# EAGLE board MonitorBoard (EAGLE 7.7.0)
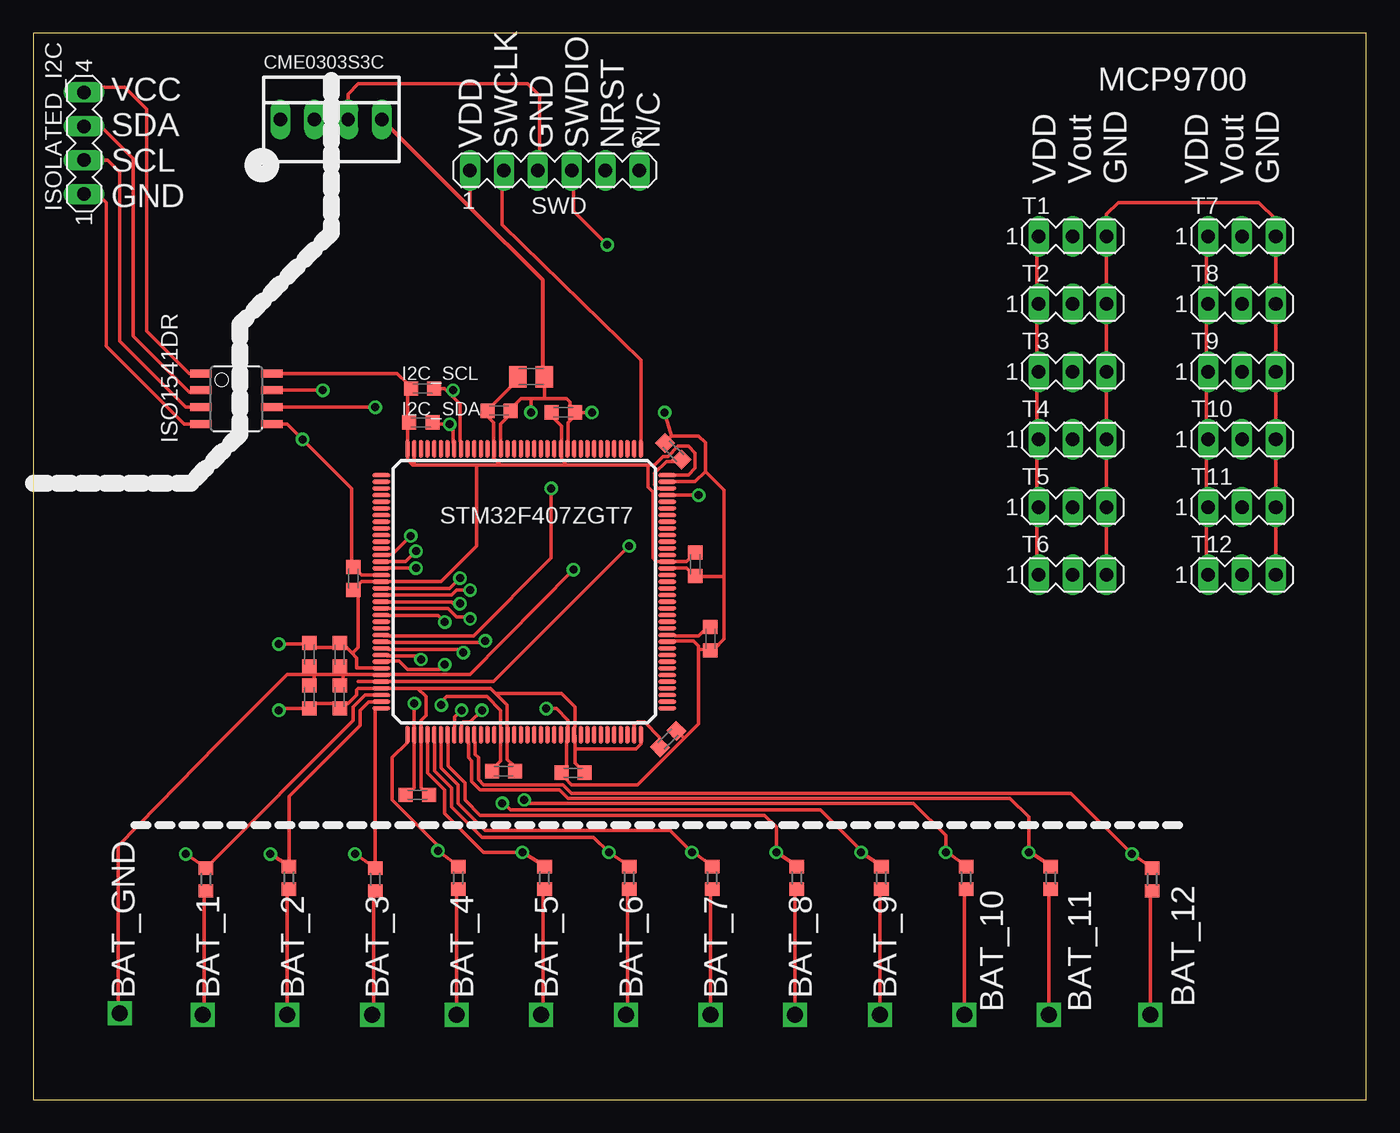
[diagram p0: board, top side]
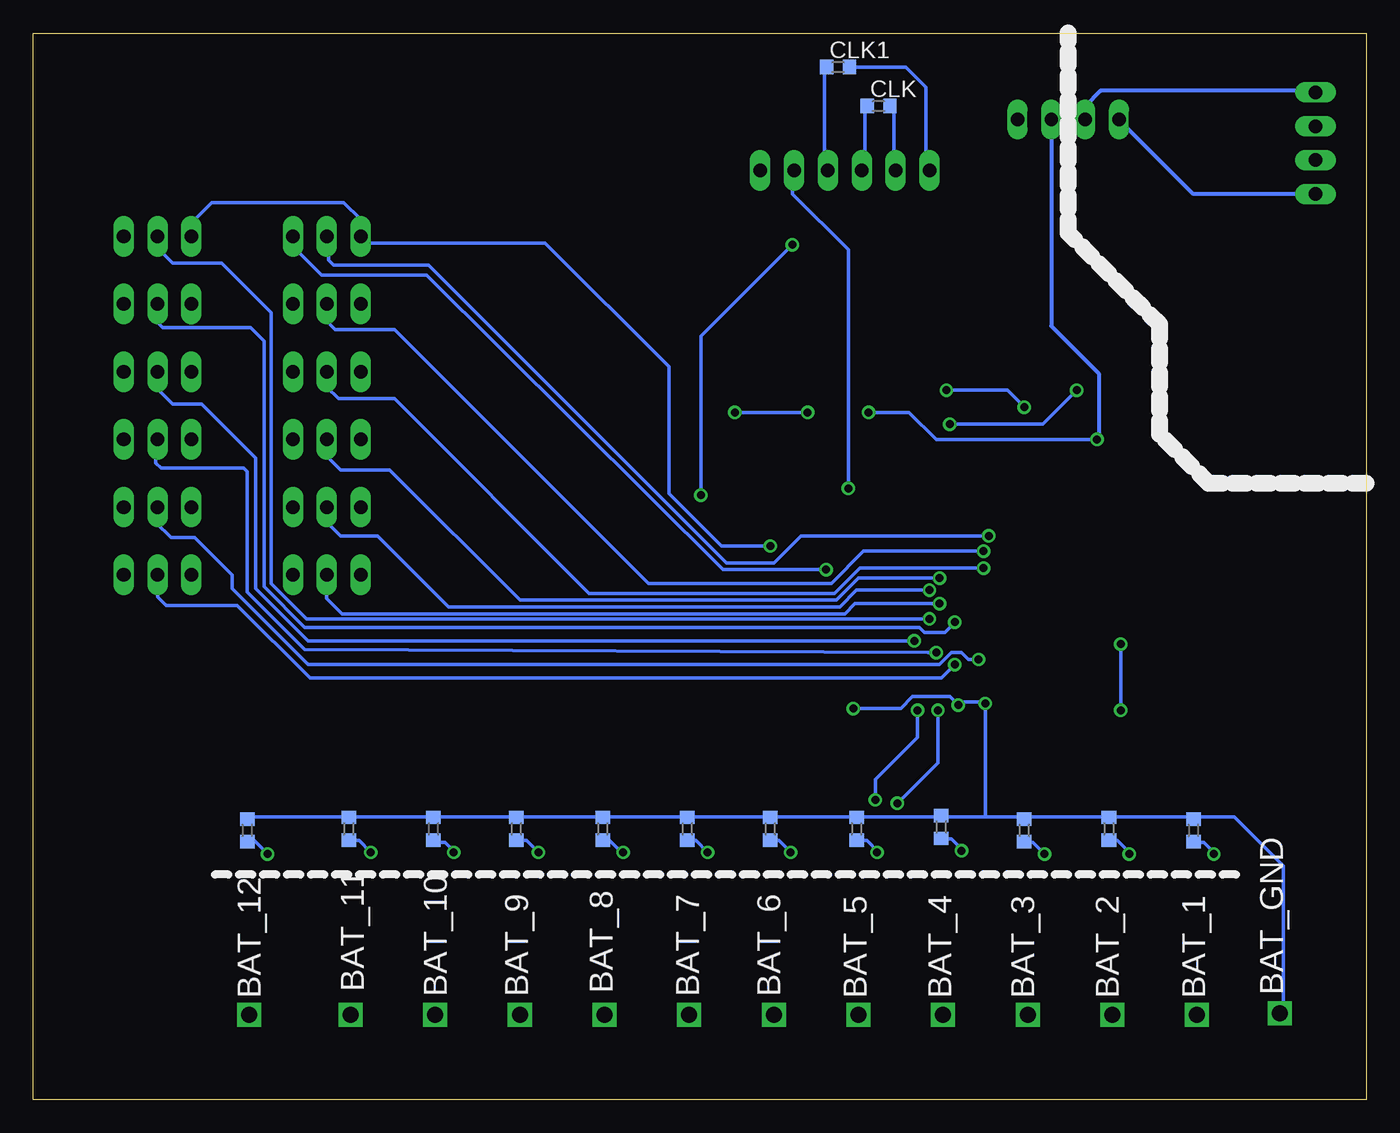
[diagram p1: board, bottom side, seen from below]

Size 100 x 80 mm. Coordinates in mm from the lower left corner, seen from the top.
Outline: 0,0 100,0 100,80 0,80 0,0
Copper layers (1*16): Top 0.035mm / dielectric 1.5mm / Bottom 0.035mm
Design rules "default": minimum track width 10mil, minimum drill 24mil, track to track 8mil, track to pad 8mil, pad to pad 8mil, via to via 8mil, smd to smd 8mil, copper to edge 40mil, drill to drill 8mil, minimum pad ring 10mil, minimum via ring 8mil, stop-mask expansion 4mil, vias tented up to drill 0mil, thermal gap 10mil

## Footprints (pad centres in the part's own frame; a part is rotated, then mirrored left to right if it is on the bottom)
C0805K = smd 1.3 x 1.6: 1 -1,0; 2 1,0
R0603 = smd 1 x 1.1: 1 -0.85,0; 2 0.85,0
22-23-2041 = drill 1 long: 1 -3.81,0; 2 -1.27,0; 3 1.27,0; 4 3.81,0
C0603K = smd 1.05 x 1.08: 1 -0.875,0; 2 0.875,0
8S1 = smd 0.6 x 1.6: 1 -1.905,-2.654; 2 -0.645,-2.654; 3 0.625,-2.654; 4 1.895,-2.654; 5 1.905,2.654; 6 0.635,2.654; 7 -0.635,2.654; 8 -1.905,2.654
MA04-1 = drill 1.016 long: 1 -3.81,0; 2 -1.27,0; 3 1.27,0; 4 3.81,0
P-TQFP-144-19 = smd 1.35 x 0.29: 1 -10.725,8.75; 2 -10.725,8.25; 3 -10.725,7.75; 4 -10.725,7.25; 5 -10.725,6.75; 6 -10.725,6.25; 7 -10.725,5.75; 8 -10.725,5.25; 9 -10.725,4.75; 10 -10.725,4.25; 11 -10.725,3.75; 12 -10.725,3.25; 13 -10.725,2.75; 14 -10.725,2.25; 15 -10.725,1.75; 16 -10.725,1.25; 17 -10.725,0.75; 18 -10.725,0.25; 19 -10.725,-0.25; 20 -10.725,-0.75; 21 -10.725,-1.25; 22 -10.725,-1.75; 23 -10.725,-2.25; 24 -10.725,-2.75; 25 -10.725,-3.25; 26 -10.725,-3.75; 27 -10.725,-4.25; 28 -10.725,-4.75; 29 -10.725,-5.25; 30 -10.725,-5.75; 31 -10.725,-6.25; 32 -10.725,-6.75; 33 -10.725,-7.25; 34 -10.725,-7.75; 35 -10.725,-8.25; 36 -10.725,-8.75; 73 10.725,-8.75; 74 10.725,-8.25; 75 10.725,-7.75; 76 10.725,-7.25; 77 10.725,-6.75; 78 10.725,-6.25; 79 10.725,-5.75; 80 10.725,-5.25; 81 10.725,-4.75; 82 10.725,-4.25; 83 10.725,-3.75; 84 10.725,-3.25; 85 10.725,-2.75; 86 10.725,-2.25; 87 10.725,-1.75; 88 10.725,-1.25; 89 10.725,-0.75; 90 10.725,-0.25; 91 10.725,0.25; 92 10.725,0.75; 93 10.725,1.25; 94 10.725,1.75; 95 10.725,2.25; 96 10.725,2.75; 97 10.725,3.25; 98 10.725,3.75; 99 10.725,4.25; 100 10.725,4.75; 101 10.725,5.25; 102 10.725,5.75; 103 10.725,6.25; 104 10.725,6.75; 105 10.725,7.25; 106 10.725,7.75; 107 10.725,8.25; 108 10.725,8.75 | smd 0.29 x 1.35: 37 -8.75,-10.725; 38 -8.25,-10.725; 39 -7.75,-10.725; 40 -7.25,-10.725; 41 -6.75,-10.725; 42 -6.25,-10.725; 43 -5.75,-10.725; 44 -5.25,-10.725; 45 -4.75,-10.725; 46 -4.25,-10.725; 47 -3.75,-10.725; 48 -3.25,-10.725; 49 -2.75,-10.725; 50 -2.25,-10.725; 51 -1.75,-10.725; 52 -1.25,-10.725; 53 -0.75,-10.725; 54 -0.25,-10.725; 55 0.25,-10.725; 56 0.75,-10.725; 57 1.25,-10.725; 58 1.75,-10.725; 59 2.25,-10.725; 60 2.75,-10.725; 61 3.25,-10.725; 62 3.75,-10.725; 63 4.25,-10.725; 64 4.75,-10.725; 65 5.25,-10.725; 66 5.75,-10.725; 67 6.25,-10.725; 68 6.75,-10.725; 69 7.25,-10.725; 70 7.75,-10.725; 71 8.25,-10.725; 72 8.75,-10.725; 109 8.75,10.725; 110 8.25,10.725; 111 7.75,10.725; 112 7.25,10.725; 113 6.75,10.725; 114 6.25,10.725; 115 5.75,10.725; 116 5.25,10.725; 117 4.75,10.725; 118 4.25,10.725; 119 3.75,10.725; 120 3.25,10.725; 121 2.75,10.725; 122 2.25,10.725; 123 1.75,10.725; 124 1.25,10.725; 125 0.75,10.725; 126 0.25,10.725; 127 -0.25,10.725; 128 -0.75,10.725; 129 -1.25,10.725; 130 -1.75,10.725; 131 -2.25,10.725; 132 -2.75,10.725; 133 -3.25,10.725; 134 -3.75,10.725; 135 -4.25,10.725; 136 -4.75,10.725; 137 -5.25,10.725; 138 -5.75,10.725; 139 -6.25,10.725; 140 -6.75,10.725; 141 -7.25,10.725; 142 -7.75,10.725; 143 -8.25,10.725; 144 -8.75,10.725
MA06-1 = drill 1.016 long: 1 -6.35,0; 2 -3.81,0; 3 -1.27,0; 4 1.27,0; 5 3.81,0; 6 6.35,0
MA03-1 = drill 1.016 long: 1 -2.54,0; 2 0,0; 3 2.54,0

## Placement (x,y rotation side)
4.7  4.7uF  [C0805K]  37.34,54.23 0 top
CLK  [R0603]  36.58,74.55 0 bottom
CLK1  [R0603]  39.62,77.47 0 bottom
CME0303S3C  [22-23-2041]  22.35,73.53 0 top
E$1  [R0603]  12.95,16.51 90 top
E$2  [R0603]  12.95,20.19 90 bottom
E$3  [R0603]  19.18,16.64 90 top
E$4  [R0603]  19.3,20.32 90 bottom
E$5  [R0603]  25.65,16.51 90 top
E$6  [R0603]  25.65,20.19 90 bottom
E$7  [R0603]  31.88,16.64 90 top
E$8  [R0603]  31.88,20.45 90 bottom
E$9  [R0603]  38.35,16.64 90 top
E$10  [R0603]  38.23,20.32 90 bottom
E$11  [R0603]  44.7,16.64 90 top
E$12  [R0603]  44.7,20.32 90 bottom
E$13  [R0603]  50.93,16.64 90 top
E$14  [R0603]  50.93,20.32 90 bottom
E$15  [R0603]  57.28,16.64 90 top
E$16  [R0603]  57.28,20.32 90 bottom
E$17  [R0603]  63.63,16.64 90 top
E$18  [R0603]  63.75,20.32 90 bottom
E$19  [R0603]  69.98,16.64 90 top
E$20  [R0603]  69.98,20.32 90 bottom
E$21  [R0603]  76.33,16.64 90 top
E$22  [R0603]  76.33,20.32 90 bottom
E$23  [R0603]  83.95,16.51 90 top
E$24  [R0603]  83.95,20.19 90 bottom
I2C_SCL  [C0603K]  29.21,53.34 0 top
I2C_SDA  [C0603K]  29.08,50.8 0 top
ISO1541DR  [8S1]  15.24,52.58 270 top
ISOLATED_I2C  [MA04-1]  3.81,71.75 90 top
STM32F407ZGT7  [P-TQFP-144-19]  36.83,38.1 0 top
SWD  [MA06-1]  39.12,69.72 0 top
T1  [MA03-1]  77.98,64.77 0 top
T2  [MA03-1]  77.98,59.69 0 top
T3  [MA03-1]  77.98,54.61 0 top
T4  [MA03-1]  77.98,49.53 0 top
T5  [MA03-1]  77.98,44.45 0 top
T6  [MA03-1]  77.98,39.37 0 top
T7  [MA03-1]  90.68,64.77 0 top
T8  [MA03-1]  90.68,59.69 0 top
T9  [MA03-1]  90.68,54.61 0 top
T10  [MA03-1]  90.68,49.53 0 top
T11  [MA03-1]  90.68,44.45 0 top
T12  [MA03-1]  90.68,39.37 0 top
VCAP1  2.2uf  [C0603K]  47.62,27.05 225 top
VCAP2  2.2uf  [C0603K]  48.01,48.64 315 top
VCAP3  .1uF  [C0603K]  49.66,40.15 90 top
VCAP4  .1uF  [C0603K]  22.99,30.2 270 top
VCAP5  .1uF  [C0603K]  50.8,34.57 90 top
VCAP6  .1uF  [C0603K]  40.49,24.51 180 top
VCAP7  .1uF  [C0603K]  35.28,24.64 180 top
VCAP8  .1uF  [C0603K]  28.81,22.86 180 top
VCAP9  .1uF  [C0603K]  22.99,33.38 270 top
VCAP10  .1uF  [C0603K]  24,39.09 270 top
VCAP11  .1uF  [C0603K]  34.95,51.69 0 top
VCAP12  .1uF  [C0603K]  39.77,51.56 0 top
VCAP13  1uF  [C0603K]  20.7,33.38 270 top
VCAP14  1uF  [C0603K]  20.7,30.2 270 top

## Library data of the parts
4.7 VCAP1-VCAP14 = rcl
CLK CLK1 E$1-E$24 = eagle-ltspice
CME0303S3C = con-molex
I2C_SCL I2C_SDA = resistor
ISO1541DR = atmel
ISOLATED_I2C SWD T1-T12 = con-lstb
STM32F407ZGT7 = micro-siemens

## Nets
RST: SWD.5
S$7: CME0303S3C.1 ISOLATED_I2C.1
S$12: T7.3
VSS5: CME0303S3C.3 CME0303S3C.4

## Tracks (layer width: path | path; a pad name or v marks a point on that pad's centre or on a via)
ADC2  (via drill 0.6)
  Top 0.254: 26.67,40.39 27.94,40.39 v28.7,41.15
  Bottom 0.254: v28.7,41.15 37.72,41.15 40.13,38.73 53.85,38.73 72.9,57.78 77.34,57.78 78.11,58.55
ADC3  (via drill 0.6)
  Top 0.254: 26.54,39.88 v28.7,39.88
  Bottom 0.254: v28.7,39.88 37.97,39.88 39.88,37.97 58.29,37.97 72.9,52.58 77.09,52.58 77.98,53.47
ADC4  (via drill 0.6)
  Top 0.254: 25.78,38.35 29.34,38.35 29.46,38.35 31.24,38.35 v32,39.12
  Bottom 0.254: v32,39.12 38.1,39.12 39.75,37.47 63.5,37.47 73.28,47.24 76.96,47.24 78.11,48.39
ADC5  (via drill 0.6)
  Top 0.254: 26.16,37.85 31.37,37.85 31.75,38.23 v32.77,38.23
  Bottom 0.254: v32.77,38.23 38.23,38.23 39.5,36.96 68.83,36.96 74.17,42.29 76.96,42.29 78.11,43.43
ADC6  (via drill 0.6)
  Top 0.254: 26.42,37.34 31.37,37.34 31.5,37.21 v32,37.21
  Bottom 0.254: v32,37.21 38.35,37.21 39.12,36.45 76.83,36.45 77.98,37.59 77.98,38.23
ADC7  (via drill 0.6)
  Top 0.254: 26.42,36.83 31.11,36.83 31.75,36.2 32.64,36.2 v32.77,36.07
  Bottom 0.254: v32.77,36.07 79.5,36.07 82.17,38.73 82.17,59.05 85.85,62.74 89.53,62.74 90.68,63.88
ADC8  (via drill 0.6)
  Top 0.254: 26.54,36.32 30.35,36.32 v30.86,35.81
  Bottom 0.254: 90.68,58.93 90.68,58.29 90.3,57.91 83.69,57.91 82.68,56.9 82.68,38.48 79.63,35.43 33.53,35.43 33.15,35.05 31.62,35.05 v30.86,35.81
ADC9  (via drill 0.6)
  Top 0.254: v33.91,34.42 33.78,34.42 33.66,34.29 26.42,34.29
  Bottom 0.254: v33.91,34.42 79.38,34.42 83.31,38.35 83.31,48.13 87.38,52.2 89.53,52.2 90.81,53.47
ADC10  (via drill 0.6)
  Top 0.254: 26.67,33.78 32,33.78 v32.26,33.53
  Bottom 0.254: 90.81,48.51 90.81,47.75 90.42,47.37 84.2,47.37 83.95,47.12 83.95,38.1 79.63,33.78 32.89,33.53 v32.26,33.53
ADC11  (via drill 0.6)
  Top 0.254: 26.54,33.27 28.83,33.27 v29.08,33.02
  Bottom 0.254: v29.08,33.02 29.84,33.02 30.35,33.53 31.11,33.53 32,32.64 79.38,32.64 85.09,38.35 85.09,39.37 87.88,42.16 89.66,42.16 90.81,43.31
ADC12  (via drill 0.6)
  Top 0.254: 26.67,32.89 27.43,32.89 28.07,32.26 30.48,32.26 v30.86,32.64
  Bottom 0.254: 90.68,38.23 90.68,37.72 90.04,37.08 84.71,37.08 79.25,31.62 31.88,31.62 v30.86,32.64
BAT_GND
  Top 0.254: 13.84,26.67 6.35,19.05 6.35,6.35
RST  (via drill 0.6)
  Top 0.254: 26.29,34.8 33.02,34.8 38.86,40.64 v38.86,45.85
  Bottom 0.254: v38.86,45.85 38.86,63.75 43.05,67.94 43.05,69.6 SWD.5
S$1
  Top 0.254: 4.57,75.95 6.86,75.95 8.51,74.3 8.51,57.66 11.68,54.48 12.32,54.48
S$2
  Top 0.254: 28.19,53.34 28.32,53.47
S$3
  Top 0.254: 48.51,27.43 48.77,27.18
S$4
  Top 0.254: 12.32,53.09 11.68,53.09 7.49,57.28 7.49,70.61 4.95,73.15
S$5
  Top 0.254: 4.83,70.48 5.59,70.48 6.48,69.6 6.48,56.9 11.43,51.94 12.45,51.94 12.57,51.82
S$6
  Top 0.254: 12.19,50.67 11.3,50.67 5.46,56.52 5.46,67.31 4.83,67.94
S$7
  Bottom 0.305: ISOLATED_I2C.1 12.95,67.94 CME0303S3C.1
S$8
  Bottom 0.305: 3.81,75.69 19.94,75.69 21.08,74.55
S$9
  Top 0.254: 23.62,73.66 23.62,75.44 24.38,76.2 37.08,76.2 37.97,75.31 37.97,69.72
S$10  (via drill 0.6)
  Top 0.254: 26.67,31.37 34.54,31.37 v44.7,41.53
  Bottom 0.254: v44.7,41.53 48.39,41.53 52.32,45.47 52.32,54.99 61.59,64.26 75.69,64.26 75.95,64.01
S$11
  Bottom 0.254: 75.44,65.28 75.44,66.04 76.71,67.31 86.61,67.31 88.27,65.66
S$12  (via drill 0.6)
  Top 0.254: 26.67,31.88 32.77,31.88 v40.51,39.75 | 80.39,39.24 80.52,39.37 80.52,66.42 81.41,67.31 91.95,67.31 93.22,66.04 93.22,65.02 T7.3 93.22,39.24
  Bottom 0.254: v40.51,39.75 48.26,39.75 70.48,61.85 78.36,61.85 80.52,64.01
S$13
  Top 0.254: 29.59,26.92 29.59,24.51 30.86,23.24 30.86,21.46 33.78,18.54 36.7,18.54 38.35,17.53
S$14
  Top 0.254: 12.83,15.75 12.83,6.1
S$15  (via drill 1.2)
  other vias: 12.7,6.35 6.48,6.48
S$16  (via drill 1.2)
  other vias: 19.05,6.35
S$17  (via drill 1.2)
  other vias: 25.4,6.35
S$18  (via drill 1.2)
  other vias: 31.75,6.35
S$19  (via drill 1.2)
  other vias: 38.1,6.35
S$20  (via drill 1.2)
  other vias: 44.45,6.35
S$21  (via drill 1.2)
  other vias: 50.8,6.35
S$22  (via drill 1.2)
  other vias: 57.15,6.35
S$23  (via drill 1.2)
  other vias: 63.5,6.35
S$24  (via drill 1.2)
  other vias: 69.85,6.35
S$25  (via drill 1.2)
  other vias: 76.2,6.35 83.82,6.35
S$26  (via drill 0.6)
  Top 0.254: v18.41,34.16 20.7,34.16
S$27
  Top 0.254: 30.1,26.8 30.1,24.64 31.37,23.37 31.37,21.97 33.66,19.68 42.04,19.68 43.18,18.54 44.7,17.53
S$28
  Top 0.254: 19.05,15.88 19.05,6.22
S$29  (via drill 0.6)
  Bottom 0.254: v82.42,18.41 83.44,19.43 83.95,19.43
S$30
  Top 0.254: 24.13,18.41 25.65,17.4
S$31
  Top 0.254: 25.53,15.75 25.53,6.1
S$32  (via drill 0.6)
  Top 0.254: v74.68,18.54 74.68,21.21 73.28,22.61 40.13,22.61 39.5,23.24 33.53,23.24 32.89,23.88 32.89,25.4 32.64,25.65 32.64,26.8
  Bottom 0.254: v74.68,18.54 75.56,19.43 76.33,19.43
S$33
  Top 0.254: 33.15,26.8 33.15,25.91 33.4,25.65 33.4,24 33.78,23.62 39.75,23.62 40.39,22.99 77.85,22.99 82.42,18.41 83.95,17.4
S$34
  Top 0.254: 31.75,15.88 31.75,6.22
S$35  (via drill 0.6)
  Top 0.254: v68.45,18.54 68.45,19.81 66.04,22.23 37.08,22.23 v36.83,22.48 | 32.13,27.94 32.13,28.19 32.26,28.32 32.77,28.32 v33.66,29.21
  Bottom 0.254: v33.66,29.21 33.66,27.18 36.83,24 v36.83,22.48
S$36  (via drill 0.6)
  Top 0.254: 30.61,26.8 30.61,24.89 31.88,23.62 31.88,22.23 33.91,20.19 47.75,20.19 v49.4,18.54
  Bottom 0.254: v49.4,18.54 50.29,19.43 50.93,19.43
S$37
  Top 0.254: 38.23,15.88 38.23,6.22
S$38  (via drill 0.6)
  Bottom 0.254: v62.1,18.54 62.99,19.43 63.75,19.43
S$39  (via drill 0.6)
  Top 0.254: 31.62,27.94 31.62,28.7 v32.13,29.21 | v35.18,22.23 35.31,22.23 35.81,21.72 59.05,21.72 62.23,18.54
  Bottom 0.254: v32.13,29.21 32.13,25.27 v35.18,22.23
S$40
  Top 0.254: 44.58,15.88 44.58,6.22
S$41  (via drill 0.6)
  other vias: 55.75,18.54
S$42
  Top 0.254: 49.53,18.54 50.93,17.53
S$43
  Top 0.254: 50.8,15.88 50.8,6.22
S$44  (via drill 0.6)
  Bottom 0.254: 18.41,34.29 v18.41,29.21
S$45
  Top 0.254: 57.28,17.53 55.75,18.54 55.75,20.45 54.86,21.34 33.53,21.34 32.38,22.48 32.38,23.75 31.11,25.02 31.11,26.8
S$46
  Top 0.254: 57.15,15.88 57.15,6.22
S$47  (via drill 0.6)
  other vias: 43.18,18.54
S$48
  Top 0.254: 62.1,18.54 63.63,17.53
S$49
  Top 0.254: 63.5,15.88 63.5,6.22
S$50  (via drill 0.6)
  other vias: 36.7,18.54
S$51
  Top 0.254: 68.58,18.54 69.98,17.53
S$52
  Top 0.254: 69.85,15.88 69.85,6.22
S$53  (via drill 0.6)
  other vias: 30.35,18.67
S$54
  Top 0.254: 74.8,18.54 76.33,17.53
S$55
  Top 0.254: 76.2,15.88 76.2,6.22
S$56  (via drill 0.6)
  Bottom 0.254: v24.13,18.41 25.02,19.3 25.65,19.3
S$57
  Top 0.254: 18.41,29.34 20.57,29.34
S$58
  Top 0.254: 83.82,15.75 83.82,6.1
S$59  (via drill 0.6)
  other vias: 17.78,18.41
S$60  (via drill 0.6)
  other vias: 11.43,18.41
S$61
  Bottom 0.254: 11.43,18.54 12.19,19.3 12.83,19.3
S$62
  Bottom 0.254: 17.65,18.41 18.67,19.43 19.3,19.43
S$63
  Bottom 0.254: 30.35,18.8 31.11,19.56 31.62,19.56
S$64
  Bottom 0.254: 36.58,18.54 37.47,19.43 38.23,19.43
S$65
  Bottom 0.254: 43.05,18.41 44.07,19.43 44.7,19.43
S$66
  Bottom 0.254: 55.88,18.54 56.77,19.43 57.28,19.43
S$67
  Bottom 0.254: 68.45,18.67 69.09,19.3 69.85,19.3
S$68
  Top 0.254: 25.53,30.35 24.89,30.35 24,29.46 24,28.45 12.95,17.4 11.43,18.41
S$69
  Top 0.254: 25.53,29.84 25.15,29.84 24.51,29.21 24.51,28.07 19.18,22.73 19.18,17.53 17.78,18.41
S$70
  Top 0.254: 25.65,29.34 25.65,17.53
S$71
  Top 0.254: 28.07,26.8 26.92,25.65 26.92,22.48 30.35,19.05 30.35,18.67 31.88,17.53
S$72  (via drill 0.6)
  Top 0.254: 35.05,27.94 35.05,29.21 34.04,30.23 30.99,30.23 30.61,29.84 | 28.57,27.94 v28.57,29.72
  Bottom 0.254: 6.22,6.22 6.22,17.53 9.91,21.21 28.57,21.21 | 28.57,21.21 84.07,21.21 84.2,21.08 | 28.57,21.21 v28.57,29.72 28.7,29.84 30.61,29.84
S$73
  Bottom 0.254: 38.61,77.47 34.54,77.47 33.02,75.95 33.02,69.85
S$74
  Top 0.254: 88.01,64.9 88.01,39.37 88.14,39.24
S$75
  Top 0.254: 75.31,64.9 75.31,39.24
S$76
  Bottom 0.254: 40.64,77.47 40.64,69.98
S$78
  Top 0.254: 40.64,27.94 40.64,29.46 39.62,30.48 34.67,30.48 | 26.54,30.86 28.83,30.86 | 28.83,30.86 29.46,30.23 29.46,28.83 29.08,28.45 29.08,27.43 | 28.83,30.86 34.29,30.86 34.67,30.48 | 34.67,30.48 35.56,29.59 35.56,27.81
S$80  (via drill 0.6)
  Top 0.254: 40.13,27.94 40.13,28.45 39.24,29.34 v38.48,29.34
  Bottom 0.254: v38.48,29.34 34.92,29.34 34.04,30.23 31.24,30.23 v30.61,29.59
S$81
  Bottom 0.254: 35.43,70.1 35.43,74.42
S$82
  Bottom 0.254: 37.59,74.17 37.59,70.23
SCL  (via drill 0.6)
  Top 0.254: 32,49.4 32,52.2 31.24,52.96 | 31.24,52.96 30.86,53.34 30.1,53.34 | v31.5,53.21 31.24,52.96 | v25.65,51.94 18.41,51.94
  Bottom 0.254: v31.5,53.21 26.92,53.21 v25.65,51.94
SDA  (via drill 0.6)
  Top 0.254: 31.5,49.28 31.5,50.16 | 31.5,50.16 30.99,50.67 30.23,50.67 | 31.5,50.16 31.5,50.42 v31.24,50.67 | 18.54,53.21 v21.72,53.21
  Bottom 0.254: v31.24,50.67 24.26,50.67 v21.72,53.21
SWCLK
  Top 0.254: 35.18,69.72 35.18,65.66 45.59,55.5 45.59,49.4
  Bottom 0.254: 35.18,69.6 35.18,69.72
SWDIO  (via drill 0.6)
  Top 0.254: 47.75,45.34 v49.91,45.34 | v43.05,64.14 40.51,66.67 40.51,69.72
  Bottom 0.254: v49.91,45.34 49.91,57.28 v43.05,64.14
VCAP1
  Top 0.254: 46.99,27.05 46.99,27.18 45.85,28.32 45.34,28.32 45.09,28.07 45.09,27.81
VCAP2
  Top 0.254: 47.12,45.85 46.86,45.85 46.61,46.1 46.61,46.99 47.5,47.88 48.39,47.88
VDD
  Top 0.254: 47.62,46.86 49.15,46.86 49.66,47.37 49.66,48.51 49.15,49.02 48.39,49.02 47.62,48.26 47.24,48.26 46.61,47.62 46.1,47.62 | 39.62,48.26 39.62,48.01 40.01,47.62 | 40.01,47.62 46.1,47.62 | 46.99,40.39 46.74,40.39 46.48,40.64 46.48,45.59 46.1,45.97 46.1,47.62 | 40.01,47.62 35.05,47.62 | 35.05,47.62 34.54,48.13 34.54,50.8 34.16,51.18 34.16,51.82 35.94,53.59 | 35.05,47.62 33.27,47.62 | 33.27,47.62 28.57,47.62 | 28.57,47.62 28.45,47.62 28.07,48.01 28.07,53.72 27.3,54.48 18.41,54.48 | 28.57,47.62 28.57,48.51 | 26.54,38.86 30.61,38.86 33.27,41.53 33.27,47.62
VDD2
  Top 0.254: 39.62,49.4 39.62,50.55 39.12,51.05
VDD4
  Top 0.254: 47.88,40.39 49.02,40.39 49.28,40.64
VDD5
  Top 0.254: 48.13,34.8 49.91,34.8 50.42,35.31
VDD6
  Top 0.254: 45.59,26.8 45.59,26.67 45.21,26.29 40.64,26.29 | 40.64,26.29 40.64,25.27 41.02,24.89 | 40.64,26.29 40.64,27.3
VDD8
  Top 0.254: 35.56,26.92 35.56,25.53 35.94,25.15
VDD9
  Top 0.254: 29.08,26.92 29.08,23.37 29.34,23.11
VDD11
  Top 0.254: 25.78,38.86 24.64,38.86 24.38,38.61 24.38,33.91 24,33.53 23.88,33.53 | 25.78,32.38 24.26,32.38 24.26,33.15 23.88,33.53 | 23.88,33.53 23.5,33.91 | 23.5,33.91 23.37,34.04 | 23.5,33.91 20.95,33.91
VDDA
  Top 0.254: 25.53,30.86 24.38,30.86 24.26,30.73 24.26,30.35 23.62,29.72 23.37,29.72 20.83,29.72
VREF
  Top 0.254: 25.65,31.37 24.38,31.37
VSS
  Top 0.254: 35.05,49.28 35.05,50.67 35.56,51.18
VSS4
  Top 0.254: 47.75,39.88 49.02,39.88 49.28,39.62
VSS5  (via drill 0.6)
  Top 0.254: 48.01,34.42 49.53,34.42 49.91,34.04 49.91,33.78 | 49.91,33.78 49.91,28.19 45.34,23.62 40.39,23.62 39.88,24.13 | 47.75,46.35 49.66,46.35 50.42,47.12 | 50.42,47.12 50.42,49.28 49.91,49.78 47.88,49.78 | 50.42,47.12 51.82,45.72 51.82,39.24 | 50.16,39.24 51.82,39.24 | 51.82,39.24 51.82,34.54 51.05,33.78 49.91,33.78 | 47.88,49.78 47.5,49.4 | v47.37,51.56 47.88,49.78 | 40.13,49.4 40.13,50.8 40.39,51.05 | 38.35,52.58 40.01,52.58 40.26,52.32 40.26,51.18 40.39,51.05 | 38.35,52.58 37.34,52.58 | 37.34,52.58 36.58,52.58 35.94,51.94 | 38.35,52.58 38.35,53.47 | 38.35,53.47 38.35,53.85 | 37.34,52.58 v37.34,51.56 | 25.65,39.37 24.64,39.37 23.88,40.13 23.88,45.85 v20.19,49.53 19.05,50.67 18.16,50.67 | v41.91,51.56 40.89,51.56 40.39,51.05 | 32.77,69.85 32.77,66.93 | 38.23,54.48 38.23,53.59 38.35,53.47
  Top 0.305: 38.23,54.48 38.23,61.47 32.77,66.93 CME0303S3C.4
  Bottom 0.254: v41.91,51.56 v47.37,51.56 | v37.34,51.56 34.29,51.56 32.26,49.53 v20.19,49.53
  Bottom 0.305: CME0303S3C.3 23.62,58.04 20.07,54.48 20.07,49.66 v20.19,49.53
VSS7
  Top 0.254: 40.01,26.92 40.01,24.89 39.88,24.77
VSS8
  Top 0.254: 35.05,26.92 35.05,25.4 34.67,25.02
VSS9
  Top 0.254: 28.57,26.8 28.57,23.37 28.32,23.11
VSSA  (via drill 0.6)
  Top 0.254: 23.24,32.26 23.24,31.88 | 23.24,31.88 23.24,31.37 | 25.53,31.88 23.24,31.88 | 23.24,31.88 21.08,31.88 | 21.08,31.88 21.08,31.5 | 21.08,31.88 21.08,32.13 | 21.08,31.88 19.05,31.88 13.84,26.67 | 26.67,40.89 26.92,40.89 v28.32,42.29
  Bottom 0.254: v28.32,42.29 42.42,42.29 44.45,40.26 48.01,40.26 70.36,62.61 77.47,62.61 77.85,62.99 77.85,63.63

## Text on the board
tNames: MCP9700 | VDD / SWCLK / GND / SWDIO / NRST / N/C | VDD / Vout / GND | VDD / Vout / GND | VCC / SDA / SCL / GND | BAT_GND | BAT_1 | BAT_2 | BAT_3 | BAT_4 | BAT_5 | BAT_6 | BAT_7 | BAT_8 | BAT_9 | BAT_10 | BAT_11 | BAT_12
bNames: BAT_GND | BAT_1 | BAT_2 | BAT_3 | BAT_4 | BAT_5 | BAT_6 | BAT_7 | BAT_8 | BAT_9 | BAT_10 | BAT_11 | BAT_12